# Altium PCB PCB11.PcbDoc (part 1 of 2)
Units mm, origin at the board's own origin, x right, y up, seen from the top; angles counter-clockwise.
Board outline 71.75 x 53.09 mm, 4 copper layers (Top Layer 1, Top Layer, Bottom Layer, Bottom Layer 1), stack 0.603 mm thick; 100 components, 62 nets, 352 pads, 213 vias.
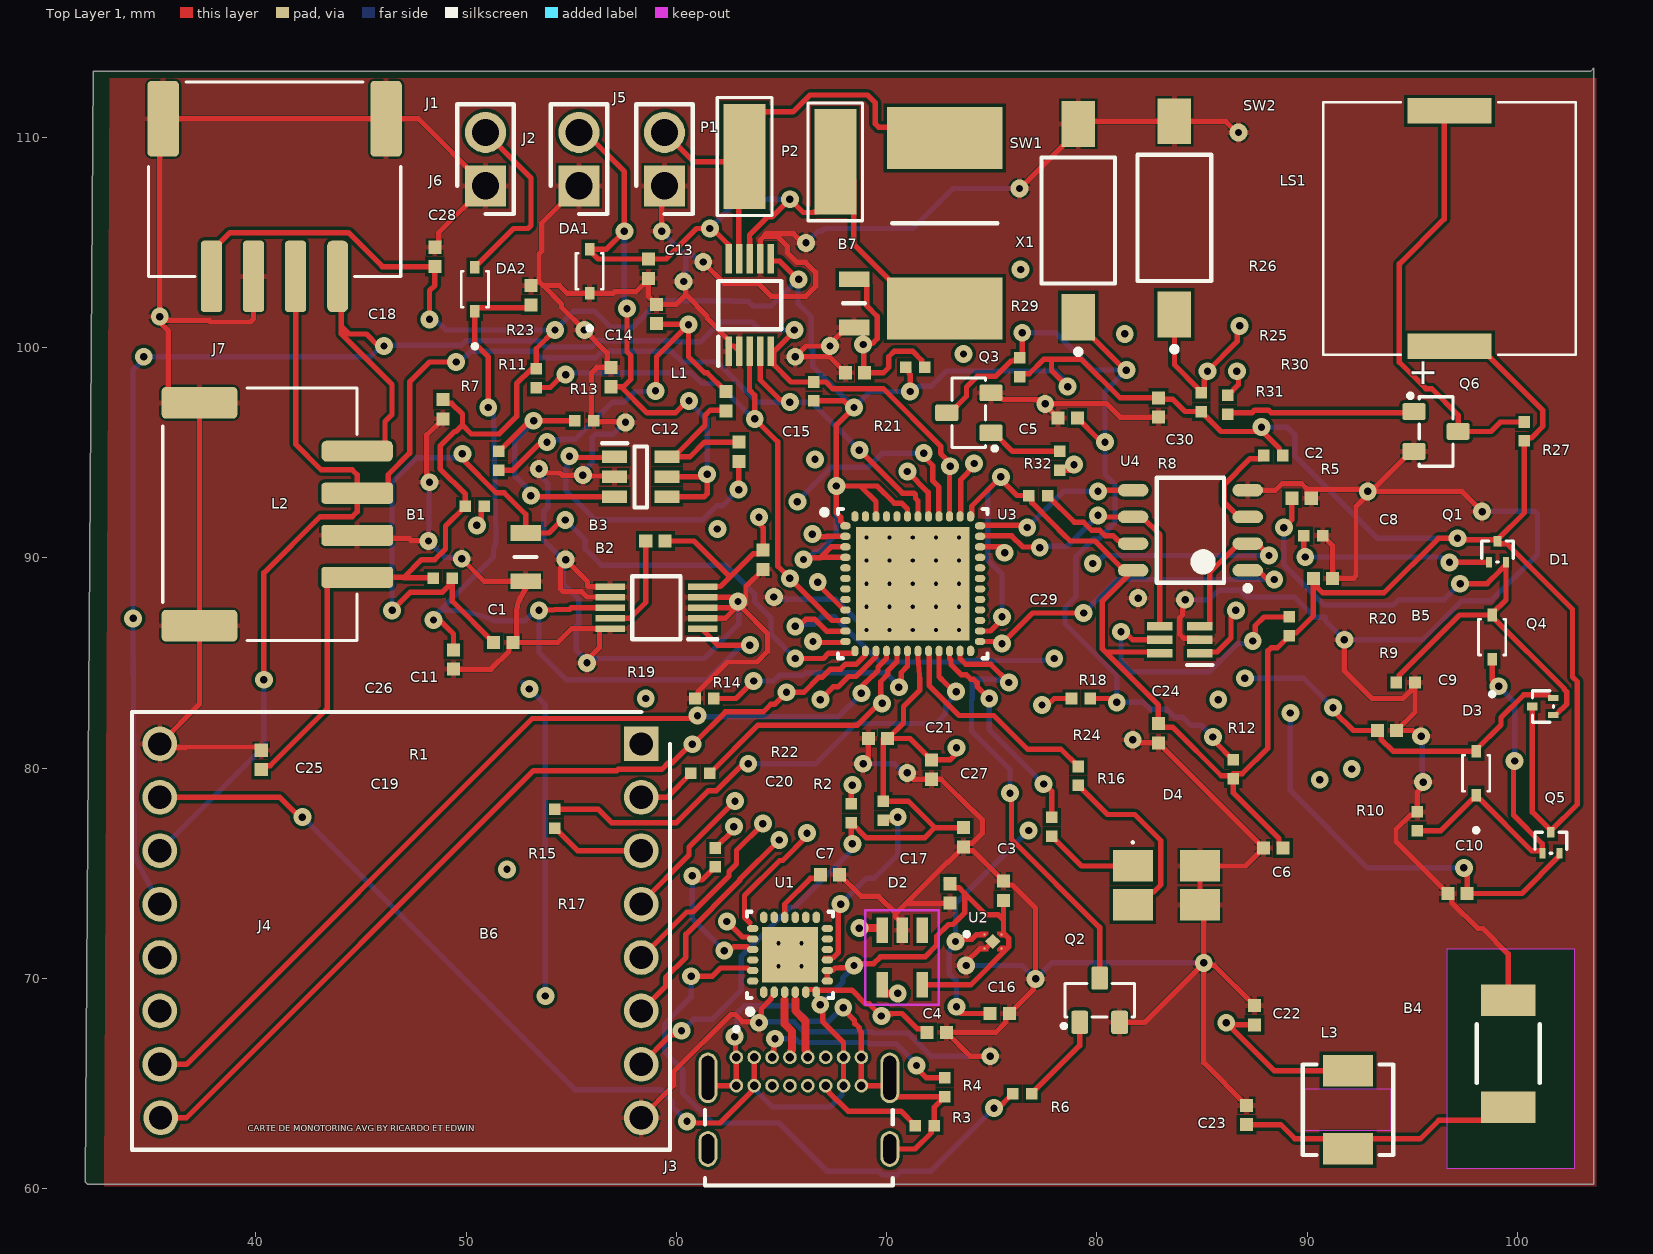
[diagram p0: Top Layer 1 view]
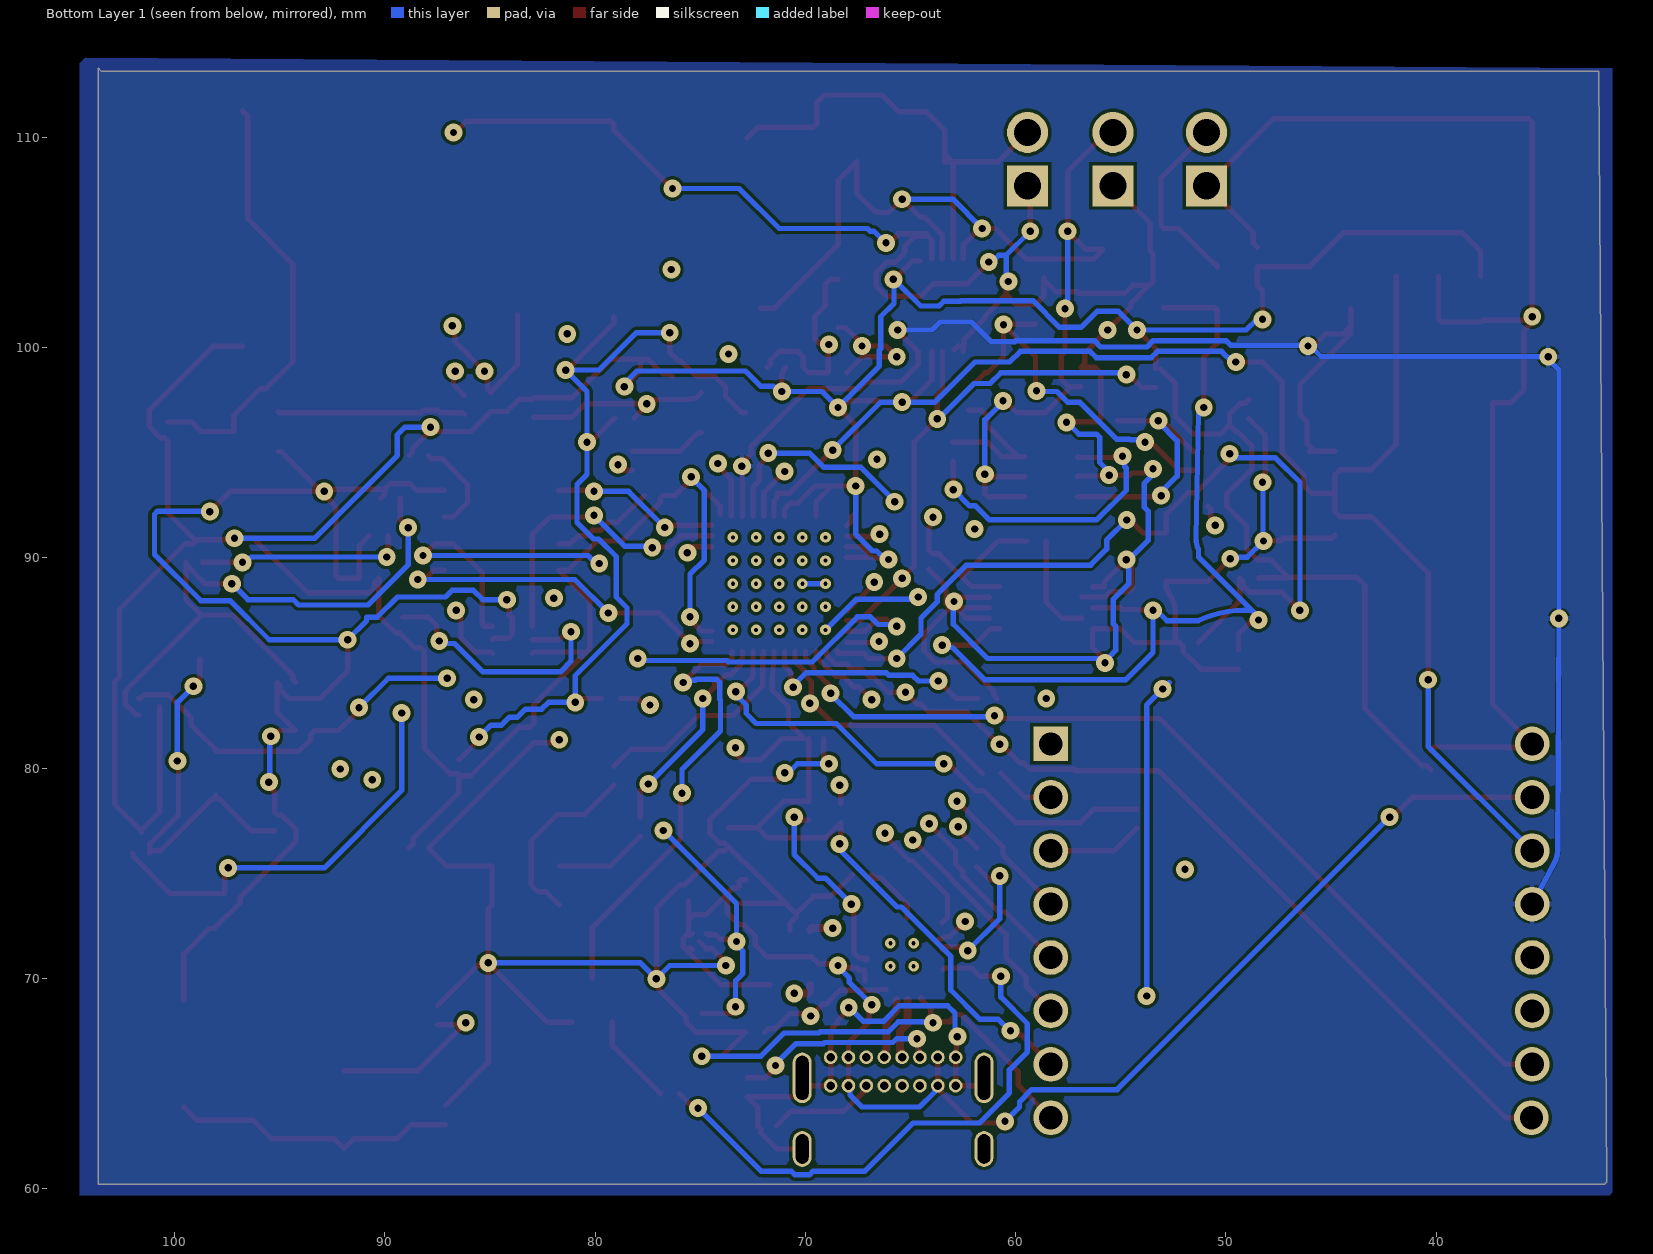
[diagram p1: Bottom Layer 1 view, seen from below]
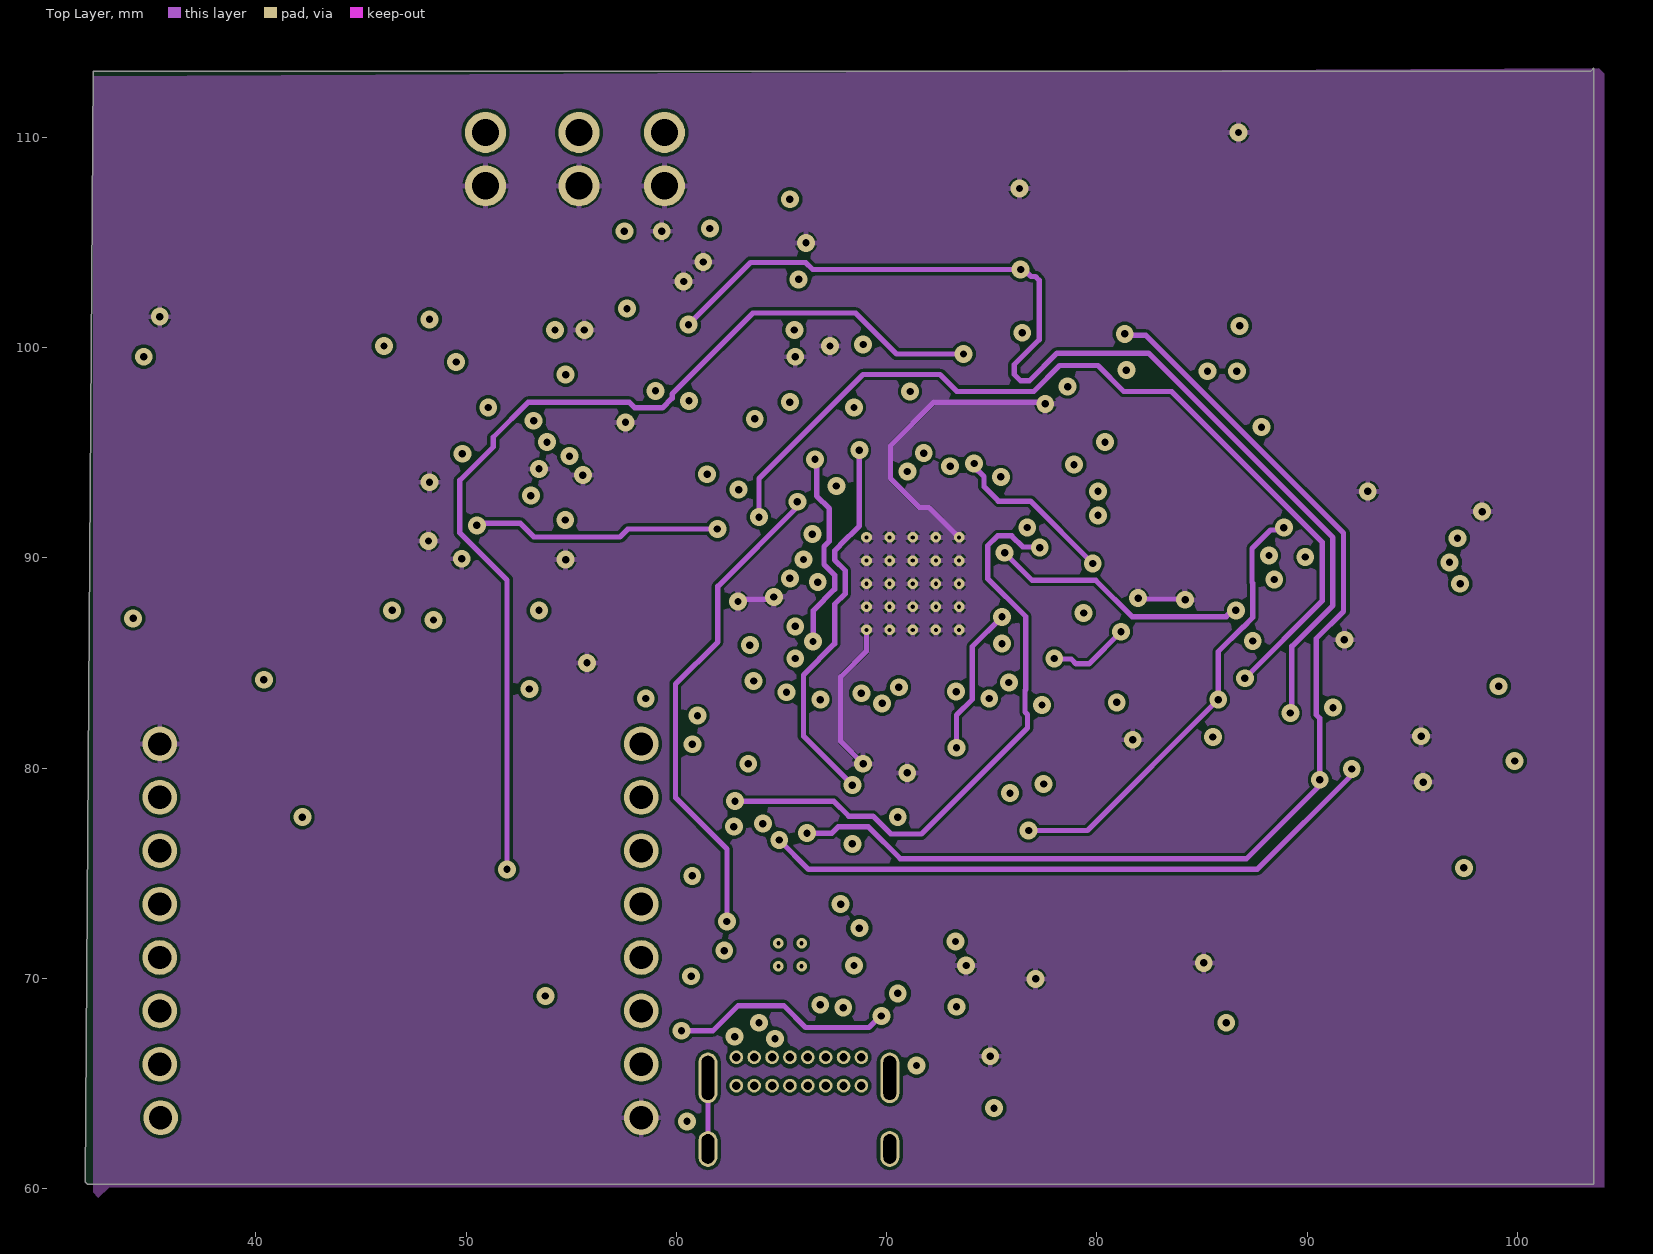
[diagram p2: Top Layer]
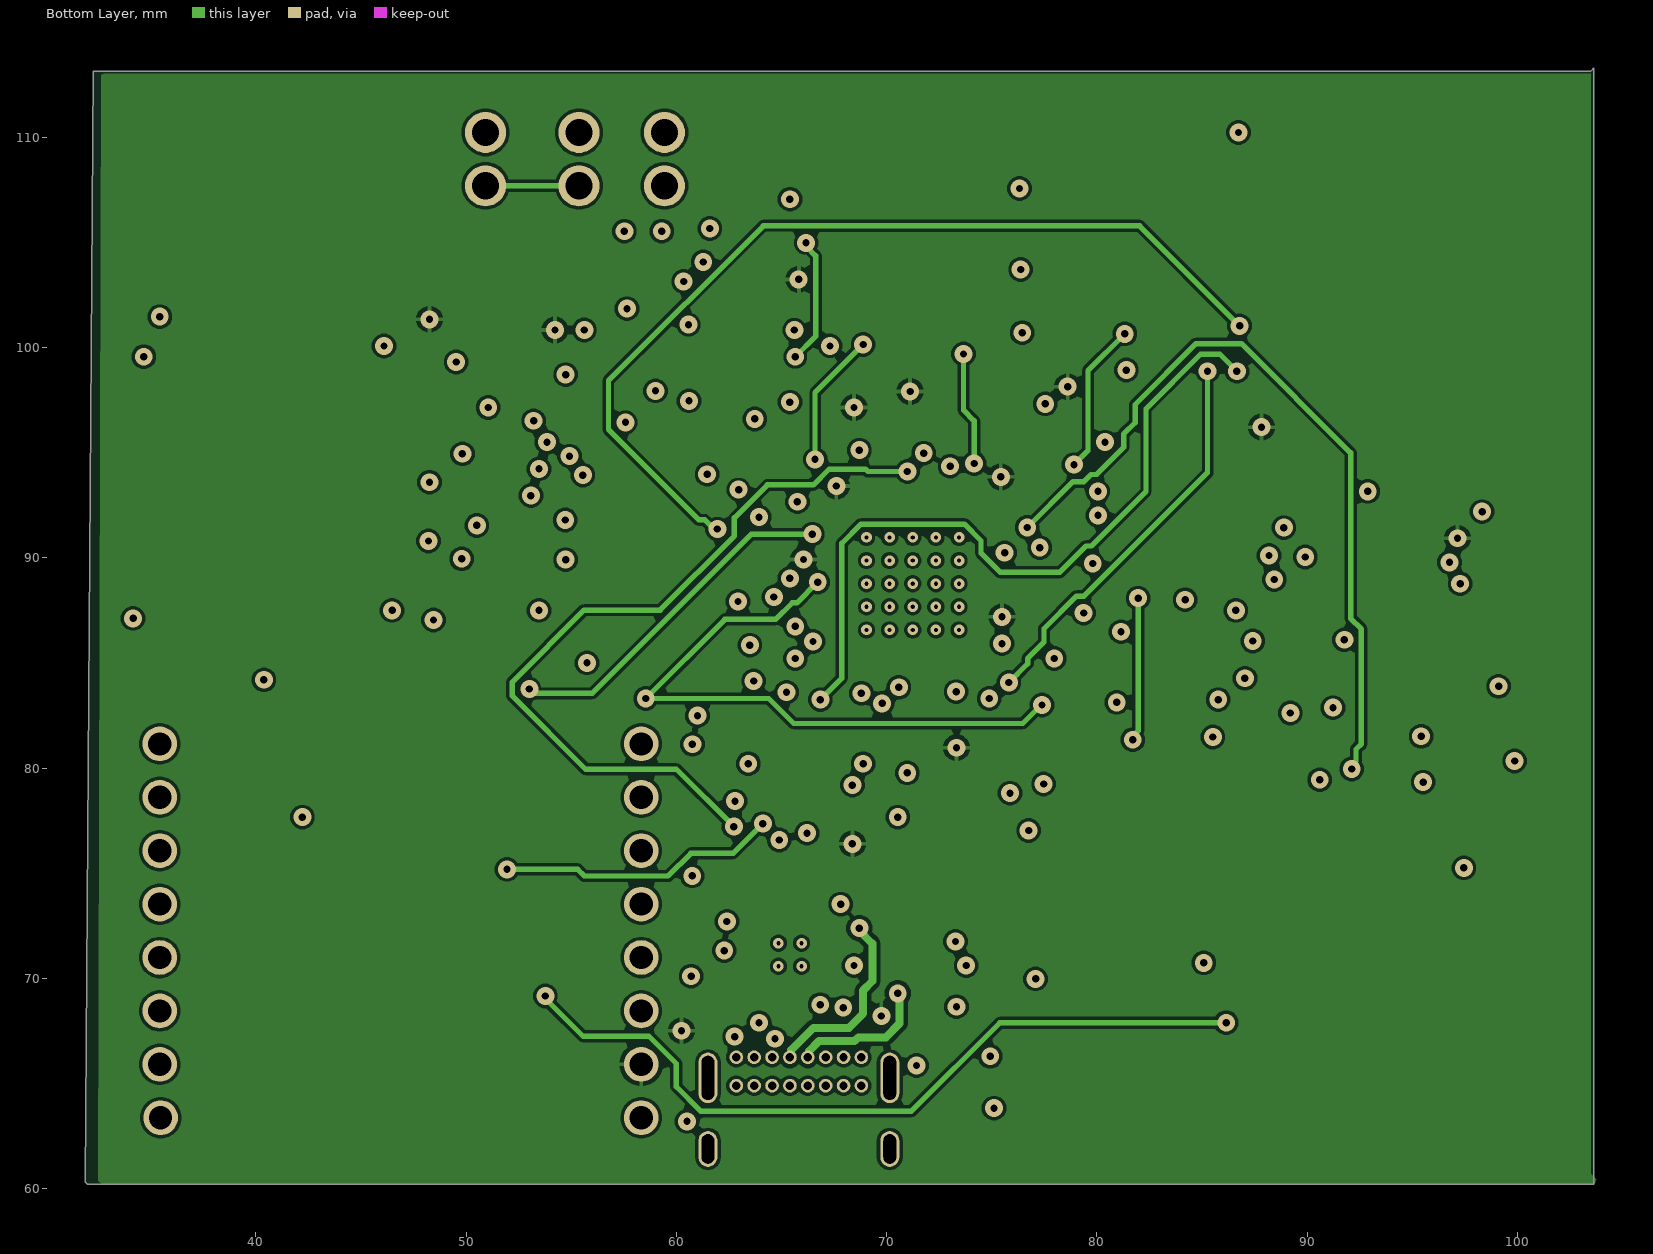
[diagram p3: Bottom Layer]

## Layer stack, top to bottom
Top Solder: solder mask 0.0102, Solder Resist, Dk 3.5
Top Layer 1: signal copper 0.035
Dielectric 2: prepreg 0.0711, PP-006, Dk 4.1
Top Layer: signal copper 0.0356
Dielectric 1: dielectric 0.32, FR-4, Dk 4.8
Bottom Layer: signal copper 0.0356
Dielectric 3: prepreg 0.0711, PP-006, Dk 4.1
Bottom Layer 1: signal copper 0.035
Bottom Solder: solder mask 0.0102, Solder Resist, Dk 3.5

## Board outline
31.877,60.325 32.004,60.198 103.632,60.198 103.632,113.284 103.505,113.157 32.258,113.157

## Design rules (kind name [scope] priority, off if disabled: settings)
AssemblyTestPointUsage [All] p1: isadvanced=TRUE
AssemblyTestpoint AssemblyTestPointStyle_1 [All] p1: isadvanced=TRUE testpointundercomponent=FALSE minsize=1.016 maxsize=2.54 preferedsize=1.524 minholesize=0 maxholesize=1.016 preferedholesize=0.813 testpointgrid=0.025 usegrid=FALSE gridtolerance=0 allowsidetop=TRUE allowsidebottom=TRUE
AssemblyTestpoint [All] p2: isadvanced=TRUE testpointundercomponent=TRUE minsize=1.016 maxsize=2.54 preferedsize=1.524 minholesize=0 maxholesize=1.016 preferedholesize=0.813 testpointgrid=0.025 usegrid=TRUE gridtolerance=0 allowsidetop=TRUE allowsidebottom=TRUE
Clearance Clearance_KeepOut [IsKeepOut] p1: gap=0 ignorepadtopadclearanceinfootprint=FALSE
Clearance Clearance_1 [InDifferentialPair('USB') And (ExistsOnLayer('Top Layer') Or ExistsOnLayer('Bottom Layer')) vs (ExistsOnLayer('Top Layer') Or ExistsOnLayer('Bottom Layer'))] p2: gap=0.19 ignorepadtopadclearanceinfootprint=TRUE sourcerule=47 cellrowname=USB cellrowtype=3 cellcolname=All cellcoltype=0 innerlayers=TRUE
Clearance Clearance_2 [InDifferentialPair('USB') And (ExistsOnLayer('Top Layer 1') Or ExistsOnLayer('Bottom Layer 1')) vs (ExistsOnLayer('Top Layer 1') Or ExistsOnLayer('Bottom Layer 1'))] p3: gap=0.19 ignorepadtopadclearanceinfootprint=TRUE sourcerule=47 cellrowname=USB cellrowtype=3 cellcolname=All cellcoltype=0 outerlayers=TRUE
Clearance Clearance_3 [InDifferentialPair('USB')] p4: gap=0.254 ignorepadtopadclearanceinfootprint=TRUE sourcerule=47 cellrowname=USB cellrowtype=3 cellcolname=All cellcoltype=0
Clearance Clearance_1 [(ExistsOnLayer('Top Layer') Or ExistsOnLayer('Bottom Layer')) vs (ExistsOnLayer('Top Layer') Or ExistsOnLayer('Bottom Layer'))] p5: gap=0.15 ignorepadtopadclearanceinfootprint=TRUE sourcerule=47 cellrowname=All cellrowtype=0 cellcolname=All cellcoltype=0 innerlayers=TRUE
Clearance Clearance_2 [(ExistsOnLayer('Top Layer 1') Or ExistsOnLayer('Bottom Layer 1')) vs (ExistsOnLayer('Top Layer 1') Or ExistsOnLayer('Bottom Layer 1'))] p6: gap=0.15 ignorepadtopadclearanceinfootprint=TRUE sourcerule=47 cellrowname=All cellrowtype=0 cellcolname=All cellcoltype=0 outerlayers=TRUE
Clearance [All] p7: gap=0.254 ignorepadtopadclearanceinfootprint=TRUE except(0: Arc-Hole Track-Hole SMDPad-Hole THPad-Hole Via-Hole Fill-Hole Poly-Hole Region-Hole Text-Hole) ismatrix=TRUE miname0=USB mitype0=3
ComponentClearance [All] p1: isadvanced=TRUE gap=0.254 collisioncheckmode=3 verticalgap=0.254 showdistances=FALSE
DiffPairsRouting [All] p1: maxlimit=0.254 minlimit=0.254 mostfreqgap=0.254 toplayer_minwidth=0.381 toplayer_maxwidth=0.381 toplayer_prefwidth=0.381 midlayer1_minwidth=0.381 midlayer1_maxwidth=0.381 midlayer1_prefwidth=0.381 midlayer2_minwidth=0.381 midlayer2_maxwidth=0.381 midlayer2_prefwidth=0.381 bottomlayer_minwidth=0.381 bottomlayer_maxwidth=0.381 bottomlayer_prefwidth=0.381 maxuncoupledlength=12.7
FabricationTestPointUsage [All] p1: isadvanced=TRUE valid=0 allowmultiple=FALSE
FabricationTestpoint [All] p1: isadvanced=TRUE side=3 testpointundercomponent=TRUE minsize=1.016 maxsize=2.54 preferedsize=1.524 minholesize=0 maxholesize=1.016 preferedholesize=0.813 testpointgrid=0.025 allowsidetop=TRUE allowsidebottom=TRUE usegrid=TRUE gridtolerance=0
FanoutControl Fanout_BGA [IsBGA] p1: isadvanced=TRUE bgadir=Out bgaviamode=Centered fanoutstyle=Auto fanoutdirection=Alternating viagrid=0.025 // Fanout_BGA (Default Rule)
FanoutControl Fanout_LCC [IsLCC] p2: isadvanced=TRUE bgadir=Out bgaviamode=Centered fanoutstyle=Auto fanoutdirection=Alternating viagrid=0.025 // Fanout_LCC (Default Rule)
FanoutControl Fanout_SOIC [IsSOIC] p3: isadvanced=TRUE bgadir=Out bgaviamode=Centered fanoutstyle=Auto fanoutdirection=Alternating viagrid=0.025 // Fanout_SOIC (Default Rule)
FanoutControl Fanout_Small [(CompPinCount < 5)] p4: isadvanced=TRUE bgadir=Out bgaviamode=Centered fanoutstyle=Auto fanoutdirection=OutThenIn viagrid=0.025 // Fanout_Small (Default Rule)
FanoutControl Fanout_Default [All] p5: isadvanced=TRUE bgadir=Out bgaviamode=Centered fanoutstyle=Auto fanoutdirection=Alternating viagrid=0.025 // Fanout_Default (Default Rule)
Height [All] p1: isadvanced=TRUE minheight=0 maxheight=25.4 prefheight=12.7
HoleSize [All] p1: isadvanced=TRUE absolutevalues=TRUE maxlimit=2.54 minlimit=0.025 maxpercent=80.000 minpercent=20.000
HoleToHoleClearance [All] p1: isadvanced=TRUE gap=0.254 allowstackedmicrovias=TRUE
LayerPairs [All] p1: isadvanced=TRUE enforce=TRUE
MinimumSolderMaskSliver [All] p1: isadvanced=TRUE minsoldermaskwidth=0.254
NetAntennae [All] p1: isadvanced=TRUE netantennaetolerance=0
PasteMaskExpansion [All] p1: isadvanced=TRUE expansion=0
PlaneClearance [All] p1: isadvanced=TRUE clearance=0.508
PlaneConnect [All] p1: isadvanced=TRUE planeconnectstyle=Relief reliefexpansion=0.508 reliefentries=4 reliefconductorwidth=0.254 reliefairgap=0.254
PolygonConnect PolygonConnectStyle_1 [InNet('+3V3_PRIO')] p1: connectstyle=Relief reliefconductorwidth=0.2 reliefentries=4 polygonreliefangle="90 Angle" airgapwidth=0.2
PolygonConnect [All] p2: connectstyle=Relief reliefconductorwidth=0.254 reliefentries=4 polygonreliefangle="90 Angle" airgapwidth=0.1
RoutingCorners [All] p1: isadvanced=TRUE cornerstyle=45-Degree minsetback=2.54 maxsetback=2.54
RoutingPriority [All] p1: isadvanced=TRUE routingpriority=0
RoutingVias [All] p1: holewidth=0.35 width=0.85 viastyle="Through Hole" minholewidth=0.35 minwidth=0.85 maxholewidth=0.35 maxwidth=0.85
ShortCircuit [All] p1: isadvanced=TRUE allowed=FALSE
SilkToSilkClearance [All] p1: isadvanced=TRUE silktosilkclearance=0.254
SilkToSolderMaskClearance [IsPad] p1: isadvanced=TRUE minsilkscreentomaskgap=0.254 clearancetoexposedcopper=TRUE
SolderMaskExpansion [All] p1: isadvanced=TRUE expansion=0.102 istentingtop=FALSE
SupplyNets "Schematic Supply Nets_5" [InNet('+36V')] p1: isadvanced=TRUE voltage=0.000
SupplyNets "Schematic Supply Nets_4" [InNet('+5V_USB')] p2: isadvanced=TRUE voltage=0.000
SupplyNets "Schematic Supply Nets_3" [InNet('GND')] p3: isadvanced=TRUE voltage=0.000
SupplyNets "Schematic Supply Nets_2" [InNet('+10V')] p4: isadvanced=TRUE voltage=0.000
SupplyNets "Schematic Supply Nets" [InNet('+3V3_PRIO')] p5: isadvanced=TRUE voltage=0.000
UnRoutedNet [All] p1: isadvanced=TRUE
UnpouredPolygon [All] p1: isadvanced=TRUE
Width [All] p1: maxlimit=0.254 minlimit=0.254 preferedwidth=0.254
3 further rules are at their usual default settings.

## Classes and differential pairs
component class Regulateurs: B2 B3 C11 C12 C13 C14 C15 C16 C17 L1 L2 R11 R13 U2
component class Connecteurs: C18 C19 C25 C26 C28 DA1 DA2 J1 J2 J4 J5 J6 J7 R14 R15
component class "Circuit de priorité": C2 C8 C9 C10 D1 D3 Q1 Q4 Q5 R5 R9 R10
component class Actionneur: D4 LS1 Q6 R16 R24 R25 R27
component class Capteurs: B1 B5 B6 B7 C1 C5 C24 C27 C29 P1 P2 R1 R20 R21 R22 R23 R26 R29 R30 SW1 SW2 X1
component class Feuille_2_ESP32: B4 C20 C21 C22 C23 C30 L3 R17 R18 R19 R31 R32 U3 U4
component class USB_UART: C3 C4 C6 C7 D2 J3 Q2 Q3 R2 R3 R4 R6 R7 R8 R12 U1
differential pair USB: +USB_P -USB_N

## Components (designator, comment, footprint, x,y, rotation, side; value= is the part's Value field where it differs from the comment)
B1 "10K" RESC2212X50N 52.832,90.036 r90 top
B2 "TPS62056DGSG4" SOP50P490X110-10N 59.055,87.63 r180 top
B3 "LMR50410Y3FQDBVRQ1" SOT95P280X145-6N 58.313,93.853 r0 top
B4 "NN01-102" NN01-102 99.568,66.421 r90 top
B5 "TMP126DCKR" SOT65P210X110-6N 83.947,86.106 r180 top
B6 "INA237AIDGST" SOP50P490X110-10N 63.492,102.022 r90 top
B7 "10K" RESC2212X50N 68.453,102.108 r90 top
C1 "100nF" CAPC1005X06N#1 51.768,85.979 r0 top
C2 "10uF" CAPC1005X06N#1 89.741,92.837 r0 top
C3 "1uF" CAPC1005X06N#1 75.565,74.168 r270 top
C4 "3uF" CAPC1005X06N#1 72.39,67.437 r0 top
C5 "100nF" CAPC1005X06N#1 78.613,96.647 r0 top
C6 "0,1uF" CAPC1005X06N#1 88.392,76.2 r180 top
C7 "4,7uF" CAPC1005X06N#1 67.31,74.93 r0 top
C8 "10uF" CAPC1005X06N#1 90.757,89.027 r0 top
C9 "10uF" CAPC1005X06N#1 93.805,81.788 r0 top
C10 "10uF" CAPC1005X06N#1 97.155,74.041 r180 top
C11 "10uF" CAPC1005X06N#1 49.403,85.169 r270 top
C12 "100nF" CAPC1005X06N#1 62.992,95.044 r90 top
C13 "100nF" CAPC1005X06N#1 59.055,101.6 r90 top
C14 "10uF" CAPC1005X06N#1 56.896,98.6 r270 top
C15 "22uF" CAPC1005X06N#1 64.135,89.916 r270 top
C16 "1uF" CAPC1005X06N#1 75.39,68.326 r180 top
C17 "1uF" CAPC1005X06N#1 73.025,74.041 r90 top
C18 "100nF" CAPC1005X06N#1 53.086,102.489 r90 top
C19 "100nF 50V" CAPC1005X06N#1 58.674,103.759 r270 top
C20 "0,1uF" CAPC1005X06N#2 69.596,81.407 r180 top
C21 "100pF" CAPC1005X06N#1 72.136,79.931 r90 top
C22 "1,2pF" CAPC1005X06N#1 87.503,68.247 r90 top
C23 "1,5pF" CAPC1005X06N#1 87.122,63.5 r90 top
C24 "0,1uF" CAPC1005X06N#1 82.931,81.661 r270 top
C25 "100nF" CAPC1005X06N#1 40.259,80.391 r90 top
C26 "100nF" CAPC1005X06N#1 48.895,97.076 r90 top
C27 "100nF" CAPC1005X06N#1 73.66,76.708 r90 top
C28 "100nF" CAPC1005X06N#1 48.514,104.315 r270 top
C29 "100nF" CAPC1005X06N#1 68.501,98.806 r0 top
C30 "100nF" CAPC1005X06N#1 82.931,97.155 r90 top
D1 "SD103AWS-7-F" SD103AWS-7-F 98.806,86.233 r90 top
D2 "824011" 824011 70.739,70.993 r180 top
D3 "SD103AWS-7-F" SD103AWS-7-F 98.044,79.756 r90 top
D4 "598-8610-207F" 5988610207F 83.312,74.422 r0 top
DA1 "SD103AWS-7-F" SD103AWS-7-F 50.419,102.777 r90 top
DA2 "SD103AWS-7-F" SD103AWS-7-F 55.88,103.632 r90 top
J1 "61300211121" 61300211121 50.927,107.696 r90 top
J2 "61300211121" 61300211121 55.372,107.696 r90 top
J3 "Use" USB4085-GF-A 65.83,61.887 r0 top
J4 "825433-8" Connect-Mikrobus 58.333,81.153 r270 top
J5 "61300211121" 61300211121 59.436,107.696 r90 top
J6 "114020164" 114020164 40.894,107.188 r180 top
J7 "114020164" 114020164 41.021,92.075 r270 top
L1 "4,7uH" LQPC1005X06N 59.563,100.251 r90 top
L2 "4,7uH" LQPC1005X06N 61.801,93.599 r0 top
L3 "3.3uH, 3.5A" WE-LHMI_4020 91.948,63.754 r270 top
LS1 "PKLCS1212E40A1-R1" SPKR_PKLCS1212E40A1-R1 96.774,105.664 r90 top
P1 "Plage CMS 10x5" "Plage CMS 10x5" 63.246,109.093 r90 top
P2 "Plage CMS 10x5" "Plage CMS 10x5" 67.564,108.839 r90 top
Q1 "SI3139K-TP" SI3139K-TP 99.06,90.297 r0 top
Q2 "SS8050-G" SS8050-G 80.137,68.961 r0 top
Q3 "SS8050-G" SS8050-G 73.914,96.901 r90 top
Q4 "SI3139K-TP" SI3139K-TP 101.219,82.931 r90 top
Q5 "SI3139K-TP" SI3139K-TP 101.6,76.454 r0 top
Q6 "SS8050-G" SS8050-G 96.139,96.012 r270 top
R1 "10K" RESC1005X06N 48.895,89.027 r180 top
R2 "4,7K" RESC1005X06N 69.85,77.978 r90 top
R3 "5,1K" RESC1005X06N 72.771,64.828 r270 top
R4 "5,1K" RESC1005X06N 71.824,62.992 r0 top
R5 "100K" RESC1005X06N 90.297,91.059 r0 top
R6 "1k" RESC1005X06N 76.454,64.516 r0 top
R7 "1k" RESC1005X06N 50.419,92.456 r0 top
R8 "1k" RESC1005X06N 78.232,94.615 r90 top
R9 "100K" RESC1005X06N 94.684,84.074 r0 top
R10 "100K" RESC1005X06N 95.25,77.47 r90 top
R11 "10K" RESC1005X06N 51.562,94.615 r270 top
R12 "1k" RESC1005X06N 86.487,79.941 r90 top
R13 "10K" RESC1005X06N 55.626,96.52 r180 top
R14 "1K" RESC1005X06N 61.145,79.756 r180 top
R15 "1k" RESC1005X06N 54.229,77.597 r270 top
R16 "330" RESC1005X06N 77.851,77.216 r90 top
R17 "520" RESC1005X06N 61.849,75.75 r270 top
R18 "0R" RESC1005X06N 79.248,83.312 r180 top
R19 "10K" RESC1005X06N 61.341,83.312 r180 top
R20 "5" RESC1005X06N 89.154,86.741 r270 top
R21 "10K" RESC1005X06N 66.548,97.917 r90 top
R22 "10K" RESC1005X06N 68.326,77.851 r90 top
R23 "10K" RESC1005X06N 53.34,98.552 r270 top
R24 "330" RESC1005X06N 79.121,79.629 r90 top
R25 "1K" RESC1005X06N 86.233,97.282 r90 top
R26 "10K" RESC1005X06N 71.374,99.06 r180 top
R27 "1K" RESC1005X06N 100.33,96.012 r90 top
R29 "10K" RESC1005X06N 76.327,99.06 r90 top
R30 "10K" RESC1005X06N 84.963,97.409 r90 top
R31 "10K" RESC1005X06N 88.392,94.869 r180 top
R32 "10K" RESC1005X06N 77.216,92.964 r0 top
SW1 "FSMSM" TECO-FSMSM-2_V 79.121,106.045 r90 top
SW2 "FSMSM" TECO-FSMSM-2_V 83.693,106.172 r90 top
U1 "CP2104-F03-GM" PQFN50P400X400X80_HS-25N 65.409,71.123 r90 top
U2 "NCP167BMX330TBG" NCP167BMX330TBG 75.057,71.755 r0 top
U3 "ESP32-PICO-D4" PQFN50P700X700X104_HS-49N 71.247,88.773 r0 top
U4 "IS66WVS1M8BLL-104NLI" SOIC127P600X175-8N 84.455,91.313 r180 top
X1 "0,001" RESC10052X200N 72.771,105.918 r90 top

## Footprints (in the part's own frame and the unit in brackets; to place one, negate y for a bottom-side part, rotate by r counter-clockwise, add the part's x,y. Pads: shape width x height; smd on the part's side, far side on the other; paste and mask are expansions set on the pad)
824011 [mil] "Suppresseurs ESD / diodes TVS WE-TVS High Speed 5uA 5VDC 2+1"
  rect 21.65x47.24 smd: 1(-37.4,-51.18) 2(0,-51.18) 3(37.4,-51.18) 4(37.4,51.18) 5(-37.5,51)
  Top Layer 1 keep-out lines w5: 68.9,88.58 -68.9,88.58 -68.9,-88.58 68.9,-88.58 68.9,88.58
  body extent -57,-55 57,55, height 57
114020164 [mm]
  rrect50% 1x3.4 smd: 1(-3,3.8)
  rrect30% 1x3.4 smd: 2(-1,3.8) 3(1,3.8) 4(3,3.8)
  rrect26% 1.5x3.6 smd: MP1(-5.3,-3.7) MP2(5.3,-3.7)
  silkscreen extent -6,-5.45 6,3.8, body extent -6.1,-5.59 5.9,4.59, height 5.2
5988610207F [mm]
  rect 1.9x1.5 smd: 1(-1.6,0.925) 2(1.6,0.925) 3(-1.6,-0.925) 4(1.6,-0.925)
  silkscreen extent -1.65,2 -1.55,2.1, body extent -1.6,-1.35 1.6,1.35, height 0.9
61300211121 [mm] "Embases et logements de câbles WR-PHD 2.54mm 2Pin T HT Header"
  rect 1.95x1.95 / inner round 1.95 / far side rect 1.95x1.95 hole 1.3: 1(0,0)
  round 1.95 hole 1.3: 2(2.54,0)
  silkscreen extent -1.35,-1.35 3.89,1.35
CAPC1005X06N#1 [mm] "Chip Capacitor, 2-Leads, Body 1,00x0,50mm, IPC Medium Density"
  rect 0.62x0.62 smd: 1(-0.46,0) 2(0.46,0)
  body extent -0.53,-0.28 0.53,0.28, height 0.55
CAPC1005X06N#2 [mm] "Chip Capacitor, 2-Leads, Body 1,00x0,50mm, IPC Medium Density"
  rect 0.62x0.62 smd paste+0 mask+0.102: 1(-0.46,0)
  rect 0.62x0.62 smd: 2(0.46,0)
  body extent -0.53,-0.28 0.53,0.28, height 0.55
Connect-Mikrobus [mm]
  rect 1.65x1.65 / inner round 1.65 / far side rect 1.65x1.65 hole 1.1: 1(0,0)
  round 1.65 hole 1.1: 2(2.54,0) 3(5.08,0) 4(7.62,0) 5(10.16,0) 6(12.7,0) 7(15.24,0) 8(17.78,0) 9(17.78,-22.86) 10(15.24,-22.9) 11(12.7,-22.9) 12(10.16,-22.9) 13(7.62,-22.9) 14(5.08,-22.9) 15(2.54,-22.9) 16(0,-22.9)
  silkscreen extent -1.52,-24.22 19.3,1.37, body extent -1.37,-24.18 19.14,1.28, height 6.7
LQPC1005X06N [mm]
  rect 0.62x0.62 smd: 1(-3.254,-2.794) 2(-2.334,-2.794)
  body extent -3.32,-3.07 -2.27,-2.52, height 0.55
NCP167BMX330TBG [mm] "Régulateurs de tension LDO LDO 700 MA ULTRA-LOW NOISE 3.3V"
  rect 0.1x0.1 smd paste-1 mask+0: 1(-0.405,0.325) 2(-0.405,-0.325) 3(0.405,-0.325) 4(0.405,0.325)
  rect 0.52x0.52 smd rot 45 mask+0.05: 5(0,0)
  Top Layer 1 region: -0.21,-0.345 -0.21,-0.455 -0.6,-0.455 -0.6,-0.195 -0.36,-0.195
  Top Layer 1 region: 0.6,0.195 0.36,0.195 0.21,0.345 0.21,0.455 0.6,0.455
  Top Layer 1 region: 0.6,-0.455 0.21,-0.455 0.21,-0.345 0.36,-0.195 0.6,-0.195
  Top Layer 1 region: -0.21,0.345 -0.36,0.195 -0.6,0.195 -0.6,0.455 -0.21,0.455
  silkscreen extent -1.35,0.25 -1.15,0.45, body extent -0.5,-0.5 0.5,0.5, height 0.38
NN01-102 [mm] "Antennes Compact Reach Xtend 2.4 GHz"
  rect 1.5x2.6 smd: 1(-2.55,0) 2(2.55,0)
  silkscreen extent -1.4,-1.5 1.4,1.5, body extent -3.6,-1.5 3.4,1.5, height 2.2
"Plage CMS 10x5" [mm] "Plage CMS 10x5"
  rect 5x2 smd paste-1 mask+0.15: 1(0,0)
  silkscreen extent -2.8,-1.3 2.8,1.3
PQFN50P400X400X80_HS-25N [mm] "PQFN, 24-Leads, Body 4,00x4,00mm, Pitch 0,50mm, Thermal Pad 2,65x2,65mm, IPC Medium Density"
  oval 0.55x0.35 smd: 1(-1.775,1.25) 2(-1.775,0.75) 3(-1.775,0.25) 4(-1.775,-0.25) 5(-1.775,-0.75) 6(-1.775,-1.25) 13(1.775,-1.25) 14(1.775,-0.75) 15(1.775,-0.25) 16(1.775,0.25) 17(1.775,0.75) 18(1.775,1.25)
  oval 0.35x0.55 smd: 7(-1.25,-1.775) 8(-0.75,-1.775) 9(-0.25,-1.775) 10(0.25,-1.775) 11(0.75,-1.775) 12(1.25,-1.775) 19(1.25,1.775) 20(0.75,1.775) 21(0.25,1.775) 22(-0.25,1.775) 23(-0.75,1.775) 24(-1.25,1.775)
  rect 2.65x2.65 smd: 25(0,0)
  silkscreen extent -2.82,-2.05 2.05,2.05, body extent -2.05,-2.05 2.05,2.05, height 0.8
PQFN50P700X700X104_HS-49N [mm] "PQFN, 48-Leads, Body 7,00x7,00mm, Pitch 0,50mm, Thermal Pad 5,40x5,40mm, IPC Medium Density"
  oval 0.5x0.35 smd: 1(-3.2,2.75) 2(-3.2,2.25) 3(-3.2,1.75) 4(-3.2,1.25) 5(-3.2,0.75) 6(-3.2,0.25) 7(-3.2,-0.25) 8(-3.2,-0.75) 9(-3.2,-1.25) 10(-3.2,-1.75) 11(-3.2,-2.25) 12(-3.2,-2.75) 25(3.2,-2.75) 26(3.2,-2.25) 27(3.2,-1.75) 28(3.2,-1.25) 29(3.2,-0.75) 30(3.2,-0.25) 31(3.2,0.25) 32(3.2,0.75) 33(3.2,1.25) 34(3.2,1.75) 35(3.2,2.25) 36(3.2,2.75)
  oval 0.35x0.5 smd: 13(-2.75,-3.2) 14(-2.25,-3.2) 15(-1.75,-3.2) 16(-1.25,-3.2) 17(-0.75,-3.2) 18(-0.25,-3.2) 19(0.25,-3.2) 20(0.75,-3.2) 21(1.25,-3.2) 22(1.75,-3.2) 23(2.25,-3.2) 24(2.75,-3.2) 37(2.75,3.2) 38(2.25,3.2) 39(1.75,3.2) 40(1.25,3.2) 41(0.75,3.2) 42(0.25,3.2) 43(-0.25,3.2) 44(-0.75,3.2) 45(-1.25,3.2) 46(-1.75,3.2) 47(-2.25,3.2) 48(-2.75,3.2)
  rect 5.4x5.4 smd: 49(0,0)
  silkscreen extent -4.32,-3.55 3.55,3.55, body extent -3.55,-3.55 3.55,3.55, height 1.04
RESC1005X06N [mm] "Chip Resistor, 2-Leads, Body 1,00x0,50mm, IPC Medium Density"
  rect 0.55x0.55 smd: 1(-0.45,0) 2(0.45,0)
  body extent -0.53,-0.28 0.53,0.28, height 0.55
RESC2212X50N [mm]
  rect 0.75x1.45 smd: 1(-1.15,0) 2(1.15,0)
  silkscreen extent 0,-0.53 0,0.53, body extent -1.07,-0.63 1.07,0.63, height 0.5
RESC10052X200N [mm]
  rect 2.95x5.5 smd: 1(-4.05,0) 2(4.05,0)
  silkscreen extent 0,-2.5 0,2.5, body extent -5,-2.6 5,2.6, height 2
SD103AWS-7-F [mm]
  rect 0.6x0.46 smd: 1(-1.05,0) 2(1.05,0)
  silkscreen extent -2.81,-0.65 0.85,0.65, body extent -1.25,-0.65 1.25,0.65, height 1.2
SI3139K-TP [mm] "MOSFET P-Channel MOSFET"
  rect 0.28x0.5 smd paste+0 mask+0.075: 1(-0.4,-0.5) 2(0.4,-0.5)
  rect 0.36x0.5 smd paste+0 mask+0.075: 3(0,0.5)
  silkscreen extent -0.75,-0.5 0.75,0.5, body extent -0.6,-0.6 0.6,0.6, height 0.55
SOIC127P600X175-8N [mm] "SOIC, 8-Leads, Body 4,90x3,90mm, Pitch 1,27mm, IPC Medium Density"
  oval 1.45x0.6 smd: 1(-2.725,1.905) 2(-2.725,0.635) 3(-2.725,-0.635) 4(-2.725,-1.905) 5(2.725,-1.905) 6(2.725,-0.635) 7(2.725,0.635) 8(2.725,1.905)
  silkscreen extent -2.85,-2.5 1.6,2.88, body extent -3,-2.5 3,2.5, height 1.75
SOP50P490X110-10N [mm]
  rect 1.4x0.3 smd: 1(-2.2,1) 2(-2.2,0.5) 3(-2.2,0) 4(-2.2,-0.5) 5(-2.2,-1) 6(2.2,-1) 7(2.2,-0.5) 8(2.2,0) 9(2.2,0.5) 10(2.2,1)
  silkscreen extent -2.9,-1.5 1.15,1.5, body extent -2.46,-1.5 2.46,1.5, height 1.06
SOT65P210X110-6N [mm]
  rect 1.2x0.4 smd: 1(-0.95,0.65) 2(-0.95,0) 3(-0.95,-0.65) 4(0.95,-0.65) 5(0.95,0) 6(0.95,0.65)
  silkscreen extent -1.55,1.2 -0.35,1.2, body extent -1.05,-1 1.05,1, height 1
SOT95P280X145-6N [mm]
  rect 1.2x0.6 smd: 1(-1.25,0.95) 2(-1.25,0) 3(-1.25,-0.95) 4(1.25,-0.95) 5(1.25,0) 6(1.25,0.95)
  silkscreen extent -1.85,-1.45 0.3,1.6, body extent -1.4,-1.45 1.4,1.45, height 1.2
SPKR_PKLCS1212E40A1-R1 [mm]
  rect 1.2x4 smd: N(5.6,0) P(-5.6,0)
  silkscreen extent -6,-6 6,6, body extent -6,-6 6,6, height 3
SS8050-G [mm]
  rrect25% 0.8x1.1 smd paste+0 mask+0.075: 1(-0.95,-1.05) 2(0.95,-1.05) 3(0,1.05)
  silkscreen extent -1.77,-1.3 1.65,0.8, body extent -1.5,-1.3 1.5,1.3, height 1.1
TECO-FSMSM-2_V [mm] "SMD, 2-Leads, Body 6x3.5mm, Pitch 9.19mm"
  rect 2.2x1.6 smd: 1(-4.595,0)
  rect 2.18x1.6 smd: 2(4.595,0)
  silkscreen extent -6.37,-1.75 3,1.75, body extent -4.98,-1.75 4.98,1.75, height 4.4
USB4085-GF-A [mm]
  round 0.65 hole 0.4: A1(-2.975,4.36) A4(-2.125,4.36) A5(-1.275,4.36) A6(-0.425,4.36) A7(0.425,4.36) A8(1.275,4.36) A9(2.125,4.36) A12(2.975,4.36) B1(2.975,3.01) B4(2.125,3.01) B5(1.275,3.01) B6(0.425,3.01) B7(-0.425,3.01) B8(-1.275,3.01) B9(-2.125,3.01) B12(-2.975,3.01)
  oval 0.9x1.7 hole 0.6 slot 1.4 at 90 deg: S1(-4.325,0) S2(4.325,0)
  oval 0.9x2.4 hole 0.6 slot 2.1 at 90 deg: S3(-4.325,3.38) S4(4.325,3.38)
  silkscreen extent -4.47,-1.74 4.47,5.8, body extent -4.47,-4.25 4.47,4.92, height 3.46
WE-LHMI_4020 [mm] "SMT Power Inductor, 2-Leads, body 4.06x4.06mm"
  rect 1.5x2.4 smd: 1(-1.85,0) 2(1.85,0)
  Top Layer 1 keep-out region: -1,2.03 1,2.03 1,-2.03 -1,-2.03
  silkscreen extent -2.15,-2.15 2.15,2.15, body extent -2.22,-2.03 2.23,2.03, height 1.8

## Part data
B1 B7: library part NB12K00103JBB, "NTC SMD Thermistor, NB12K, 10K, 5% AVX 10k 0805 Protection NTC Thermistor, 5s, 2 x 1.25 x 1.3mm", Manufacturer_Name="Kyocera AVX", Mouser Part Number=581-NB12K00103JBB, Arrow Part Number=NB12K00103JBB, Arrow Price/Stock=https://www.arrow.com/en/products/nb12k00103jbb/avx, Datasheet Link=https://datasheet.datasheetarchive.com/originals/distributors/Datasheets-DGA6/551314.pdf, Geometry.Height=0.5mm, Manufacturer_Part_Number=NB12K00103JBB, Mouser Price/Stock=https://www.mouser.co.uk/ProductDetail/AVX/NB12K00103JBB/?qs=4%252B6%252BTdINQeDPvI%252BQUQjJ3Q%3D%3D
B2: "TEXAS INSTRUMENTS - TPS62056DGSG4 - Synchronous Buck (Step Down) Switching Regulator, Fixed, 2.7V-10Vin, 3.3V/0.8A out, 850kHz, VSSOP-10", Manufacturer_Name="Texas Instruments", Mouser Part Number=595-TPS62056DGSG4, Manufacturer_Part_Number=TPS62056DGSG4
B3: "Régulateurs de tension de commutation Automotive qualified SIMPLE SWITCHER 4-V to 36-V, 1-A synchronous step-down converter 6-SOT-23 -40 to 150", Manufacturer_Name="Texas Instruments", Mouser Part Number=595-R50410Y3FQDBVRQ1, Manufacturer_Part_Number=LMR50410Y3FQDBVRQ1
B4: "Antennes Compact Reach Xtend 2.4 GHz"
B5: "Board Mount Temperature Sensors +/-0.25 C SPI temperature sensor with 175 C operation, CRC and slew-rate alert", Manufacturer_Name="Texas Instruments", Mouser Part Number=595-TMP126DCKR, Manufacturer_Part_Number=TMP126DCKR
B6: "Current Sense Amplifiers 85-V, 16-bit, I2C output current/voltage/power monitor with alert 10-VSSOP -40 to 125", Manufacturer_Name="Texas Instruments", Mouser Part Number=595-INA237AIDGST, Manufacturer_Part_Number=INA237AIDGST
C1 C2 C3 C4 C5 C6 C7 C8 C9 C10 C11 C12 C13 C14 C15 C16 C17 C18 C19 C20 C21 C22 C23 C24 C25 C26 C27 C28 C29 C30: library part Capacitor
D1 D3 DA1 DA2: "Diode Array 3 Independent Schottky 40V 175mA Surface Mount 6-TSSOP, SC-88, SOT-363"
D2: "TVS Diode Array WE-TVS, High Speed Series  - Low capazity - No leakage current - Low clamping voltage - high ESD voltage protection  -- USB 1.0 - 2.0"
D4: "Standard LEDs - SMD Red/Green WC 80/50mcd 645/570nm", Manufacturer_Name=Dialight, Mouser Part Number=645-598-8610-207F, Arrow Part Number=598-8610-207F, Arrow Price/Stock=https://www.arrow.com/en/products/598-8610-207f/dialight?region=nac, Datasheet Link=https://media.digikey.com/pdf/Data%20Sheets/Dialight%20PDFs/598%20Series%201210%20Pkg%20Bi-Color.pdf, Geometry.Height=0.8mm, Manufacturer_Part_Number=598-8610-207F, Mouser Price/Stock=https://www.mouser.co.uk/ProductDetail/Dialight/598-8610-207F?qs=7JStj%2FjQ2SFuCjosqwklHQ%3D%3D
J1 J2 J5: "WURTH ELEKTRONIK - 61300211121 - HEADER, 2.54MM, PIN, THT, VERTICAL, 2WAY"
J3: library part USB4085-GF-A, "Connecteurs USB USB Type C, 2.0, Rec, TH , G/F, RA , Top Mnt, T & R"
J4: library part Connect-Mikrobus, "Headers & Wire Housings 8P double for connection mikrobus", Manufacturer_Name="TE Connectivity", Mouser Part Number=571-825433-8, Manufacturer_Part_Number=825433-8
J6 J7: "Seeed Studio Accessories Grove Female Header - SMD-4P-2.0mm-90D-20Pcs", Manufacturer_Name="Seeed Studio", Mouser Part Number=713-114020164, Manufacturer_Part_Number=114020164
L1 L2: library part Bobine
L3: library part 74437324033, "WE-LHMI SMT Power Inductor, size 4020, 3.3uH, 3.5A, 76mOhm", Case/Size Code=4020, DC Resistance=69mOhm, DC Resistance Max=76mOhm, Inductance=3.3uH, Manufacturer="Wurth Elektronik", Operating Temperature Max=125°C, Operating Temperature Min=-40°C, Performance Rated Current=3.5A, Saturation Current @ 10%=2.75A, Saturation Current @ 30%=5.45A, Self Resonant Frequency=40MHz, Category="Power Inductors", ComponentLink1Description="Website Link", ComponentLink1URL=https://www.we-online.com/redexpert/article/74437324033?ad, ComponentLink2Description="Datasheet Link", ComponentLink2URL=https://www.we-online.com/redexpert/spec/74437324033?ad, Height=1.8mm, Length=4.06mm, Manufacturer Part Number=74437324033, Match Code=WE-LHMI, Mount="Surface Mount", Packaging="Tape and Reel", Width=4.06mm
LS1: "Buzzers Transducer, Externally Driven Piezo 1.5V 2kHz 70dB @ 1.5V, 10cm Surface Mount Solder Pads", Package=None, Availability=Unavailable, MF="Murata Electronics", MP=PKLCS1212E40A1-R1, Price=None
P1 P2: "Plage de report CMS 10x5mm", Footprint_statut=ok, PN=L30
Q1 Q4 Q5: "MOSFET P-Channel MOSFET"
Q2 Q3 Q6: "Bipolar Transistors - BJT NPN TRANSISTOR 1.5A 40V"
R1 R2 R3 R4 R5 R6 R7 R8 R9 R10 R11 R12 R13 R14 R15 R16 R17 R18 R19 R20 R21 R22 R23 R24 R25 R26 R27 R29 R30 R31 R32: library part Resistor
SW1 SW2: library part CMP-2000-07511-1, "FSMSM Push Button Switch, 50 mA, -35 to 85 degC, 2-Pin SMD, RoHS, Bulk", Case\/Package=SMD/SMT, Contact Current Rating=50mA, Contact Resistance=100mOhm, Manufacturer="TE Connectivity", Max Operating Temperature=85degC, Max Voltage Rating (DC)=12V, Min Operating Temperature=-35degC, Operating Force=180gf, Package Description="2-Pin Surface Mount Device, Body 6 x 3.5 mm, Pitch 9.19 mm", Package Quantity=1000, Voltage Rating (DC)=24V, Actuator Length=1.07mm, Actuator Material=Polyamide, Contact Material=Brass, Contact Plating=Silver, Current Rating=50mA, Datasheet URL=http://www.te.com/commerce/DocumentDelivery/DDEController?Action=showdoc&DocId=Customer+Drawing%7F1437566-3%7FC2%7Fpdf%7FEnglish%7FENG_CD_1437566-3_C2_1437566_3_1_c.dwg.pdf%7F1437566-3, Datasheet Version="Rev. C2, 08/2014", Electrical Life=20000Cycles, ELV=Compliant, Illumination Type=Illuminated, Lead Free=LeadFree, Manufacturer URL=http://www.te.com/, Mechanical Life=20000Cycles, Mount=SurfaceMount, Mounting Technology=SurfaceMount, Orientation=Straight, Package Reference=FSMSM, Packaging=LoosePiece, REACH SVHC=Unknown, RoHSCompliant=true, Switch Travel=0.25mm, Termination=GullWing, Throw Configuration=SPST
U1: library part USBBridge, "USB Bridge, USB to UART USB 2.0 UART Interface 24-QFN (4x4)", Manufacturer 1="Silicon Labs", Manufacturer Part Number 1=CP2104-F03-GM, Supplier 1="Arrow Electronics", Supplier Part Number 1=CP2104-F03-GM
U2: "Régulateurs de tension LDO LDO 700 MA ULTRA-LOW NOISE 3.3V"
U3: library part ESP32, "Système RF sur puce - SoC SIP module ESP32 with 4MByte Flash, Dual Core MCU, Wi-Fi & Bluetooth Combo, LGA48-pin, 7*7mm", Manufacturer 1="Espressif Systems", Supplier Part Number 1=1904-1029-1-ND, Manufacturer Part Number 1=ESP32-PICO-D4, Supplier 1=Digi-Key
U4: library part SRAM, "SRAM 8Mb, SerialRAM, 2.7V-3.6V, 104MHz, 8 pin SOIC 150 mil, RoHS", Manufacturer 1=ISSI, Supplier Part Number 1=706-IS66WVS1M8BLL-104NLI-ND, Manufactuer Part Number 1=IS66WVS1M8BLL-104NLI, Supplier 1=Digi-Key
X1: library part PSR400ITQFF0L50, "ROHM - PSR400ITQFF0L50 - SMD Current Sense Resistor, 500 ohm, PSR Series, 3921 [1052 Metric], 4 W, +/- 1%, Metal Strip", Manufacturer_Name="ROHM Semiconductor", Mouser Part Number=755-PSR400ITQFF0L50, Datasheet Link=https://componentsearchengine.com/Datasheets/2/PSR400ITQFF0L50.pdf, Geometry.Height=2mm, Manufacturer_Part_Number=PSR400ITQFF0L50, Mouser Price/Stock=https://www.mouser.co.uk/ProductDetail/ROHM-Semiconductor/PSR400ITQFF0L50?qs=493kPxzlxfLaT1w5Mo%252BtHg%3D%3D

## Via types
v1: diameter 0.85, hole 0.35, Top Layer 1 to Bottom Layer 1, 184 vias
v2: diameter 0.5, hole 0.2, Top Layer 1 to Bottom Layer 1, 29 vias

## Nets (pads, with @x,y where several pads share a name; then routed paths per layer and width w, separated by ;. In a path a pad name is that pad's centre, name@x,y a point inside that pad or via, vN(x,y) a via of type N, cw(c..) or ccw(c..) an arc to the next point about the centre after c; other vN are vias at no path point)
+3V3_PRIO: B5.6 B6.6 C4.1 C6.1 C8.1 C20.1 C21.2 C24.1 C25.1 C26.2 C27.2 C28.2 C30.2 J4.7 J6.4 J7.4 LS1.P Q1.3 Q4.3 Q5.3 R1.2 R2.2 R7.1 R12.1 R20.2 R21.1 R22.1 R23.1 R26.2 R27.1 R29.1 R30.1 R31.1 R32.1 U1.5 U1.6 U3.1 U3.3 U3.4 U3.19 U3.26 U3.37 U3.43 U3.46 U4.8 | length 299.8
  Top Layer 1 w0.254: J6.4@37.894,103.388 37.894,104.588 38.775,105.469 44.405,105.469 46.019,103.855 C28.2@48.514,103.855 48.514,102.962 48.26,102.708 v1(48.26,101.346) ; C25.1@40.259,79.931 40.442,80.114 40.681,80.114 43.398,82.831 43.398,88.704 43.769,89.075 J7.4@44.821,89.075 47.038,89.075 47.879,89.916 48.511,89.916 49.022,90.427 49.022,91.509 R7.1@49.969,92.456 49.969,93.033 48.768,94.234 48.768,95.33 49.45,96.012 49.53,96.012 49.829,96.311 ; 47.038,89.051 48.421,89.051 R1.2@48.445,89.027 ; C26.2@48.895,97.536 49.078,97.353 49.317,97.353 49.829,96.841 49.829,96.311 ; R23.1@53.107,98.985 52.407,98.285 52.407,96.723 51.577,95.893 50.247,95.893 49.829,96.311 ; R23.1@53.34,99.002 53.34,99.949 v1(54.229,100.838) ; J4.7@58.333,65.913 59.73,67.31 v1@60.325,67.31 ; B6.6@64.532,104.124 64.913,104.124 65.791,103.246 v1(65.82,103.246) ; v1(66.048,89.924) 66.125,90.001 66.846,90.001 66.868,90.023 ; U1.5@66.161,69.469 66.525,69.469 66.528,69.472 66.559,69.441 68.354,69.441 69.008,68.787 69.177,68.787 v1@69.677,68.288 ; R21.1@66.548,97.467 67.98,97.467 68.292,97.155 v1(68.453,97.155) 67.615,96.317 v1(67.615,93.418) 69.552,93.418 70.366,92.604 70.718,92.604 70.997,92.325 U3.43@70.997,91.973 ; v1@67.615,93.304 67.615,92.147 67.818,91.944 67.818,91.752 U3.1@68.047,91.523 ; U3.4@68.047,90.023 66.868,90.023 ; U3.3@68.047,90.523 67.368,90.523 66.868,90.023 ; v1@68.326,76.327 R22.1@68.326,77.401 69.03,76.697 71.822,76.697 72.294,77.168 ; 68.77,93.408 69.497,92.682 U3.46@69.497,91.973 ; v1(69.752,68.212) v1@69.677,68.288 ; C20.1@69.85,81.407 R2.2@69.85,78.428 71.034,78.428 72.294,77.168 ; 70.28,68.326 69.715,68.326 v1@69.677,68.288 ; 70.28,68.326 70.739,68.326 71.454,67.611 71.756,67.611 C4.1@71.93,67.437 ; R26.2@70.924,99.06 71.072,98.912 71.072,98.771 71.12,98.723 v1(71.12,97.917) ; U3.19@71.497,85.573 71.497,85.285 71.571,84.394 ; 71.572,84.29 71.572,83.694 70.806,82.927 70.806,82.157 C20.1@70.056,81.407 71.12,81.407 C21.2@72.136,80.391 73.025,80.391 v1@73.406,80.772 ; C27.2@73.66,77.168 72.294,77.168 ; U3.37@74.053,92.068 74.053,92.468 v1@75.373,93.788 ; U3.26@74.447,86.523 74.948,86.523 75.42,86.995 v1@75.438,86.995 ; v1(75.438,93.853) 75.438,93.723 76.197,92.964 R32.1@76.766,92.964 76.914,92.816 76.914,92.627 77.93,91.611 ; R29.1@76.327,98.61 76.475,98.758 76.787,98.758 77.47,99.441 77.849,99.441 ; 77.931,91.611 78.403,91.139 ; 78.403,91.138 78.736,90.805 79.908,90.805 81.305,89.408 U4.8@81.73,89.408 80.264,87.942 80.264,85.674 80.413,85.525 ; v1(78.613,98.144) 77.849,98.908 77.849,99.441 ; B5.6@82.997,85.456 82.928,85.525 80.413,85.525 ; R12.1@86.487,79.735 86.92,79.735 88.138,80.953 88.138,85.576 88.287,85.725 88.588,85.725 R20.2@89.154,86.291 89.302,86.439 89.491,86.439 90.297,87.245 C8.1@90.297,89.027 90.48,88.844 90.48,88.605 90.749,88.336 93.648,88.336 96.244,90.932 v1(97.155,90.932) 97.223,90.864 99.007,90.864 99.032,90.839 99.06,90.811 Q1.3@99.06,90.797 ; v1(87.837,96.219) v1@87.837,96.008 ; R31.1@88.842,94.869 88.694,95.017 88.694,95.206 87.891,96.008 v1@87.837,96.008 ; C6.1@88.852,76.2 88.669,76.383 88.669,76.653 86.487,78.835 R12.1@86.487,79.491 86.339,79.639 85.921,79.639 83.622,81.938 83.114,81.938 C24.1@82.931,82.121 82.931,83.007 80.413,85.525 ; LS1.P@96.774,100.064 98.174,100.064 101.219,97.019 101.219,96.262 100.667,95.71 100.478,95.71 R27.1@100.33,95.562 100.33,92.137 Q1.3@99.06,90.867 ; Q1.3@99.06,90.727 99.113,90.674 99.512,90.674 102.628,87.558 102.628,84.34 102.858,84.11 102.858,78.282 Q5.3@101.6,77.024 ; Q4.3@100.719,82.931 100.719,77.905 Q5.3@101.6,77.024 ; Q5.3@101.6,76.954 Q5.3@101.6,77.024 ; 77.849,99.441 79.277,99.441 81.103,97.615 C30.2@82.931,97.615 83.008,97.538 83.622,97.538 84.201,96.959 R30.1@84.963,96.959 85.914,96.008 v1@87.837,96.008
  Top Layer w0.254: v1(60.249,67.51) 61.745,67.51 62.932,68.697 65.125,68.697 66.154,67.667 69.157,67.667 69.702,68.212 v1(69.752,68.212) ; v1(73.33,80.972) 73.33,82.521 74.077,83.268 74.077,85.782 v1(75.489,87.195)
  Bottom Layer 1 w0.254: v1(48.26,101.346) 48.535,101.346 49.043,100.838 v1(54.229,100.838) 55.118,101.727 56.134,101.727 56.896,100.965 57.912,100.965 59.182,102.235 62.611,102.235 62.638,102.208 63.417,102.208 63.644,101.981 64.516,101.981 65.781,103.246 v1@65.786,103.246 ; v1(60.249,67.51) 60.28,67.51 60.835,68.064 61.714,68.064 63.087,69.437 63.087,71.049 65.433,73.394 65.644,73.394 68.263,76.013 68.263,76.286 v1(68.377,76.4) ; v1(65.82,103.246) v1@65.786,103.246 ; v1(66.048,89.924) 66.21,89.924 66.611,90.326 66.806,90.326 67.615,91.135 v1(67.615,93.418) ; v1(75.438,93.853) 75.438,93.839 74.81,93.211 74.81,89.909 75.489,89.23 v1(75.489,87.195) ; v1(78.613,98.144) 78.613,98.298 78.022,98.889 72.854,98.889 72.136,98.171 71.535,98.171 71.281,97.917 v1(71.12,97.917) 69.215,97.917 v1(68.453,97.155) 66.484,99.124 66.484,99.886 66.421,99.949 66.421,101.473 65.786,102.108 v1@65.786,103.246 ; v1(87.837,96.219) 89.052,96.219 89.408,95.863 89.408,94.869 93.345,90.932 v1(97.155,90.932)
+5V_USB: C3.2 C17.2 D2.5 J3.A4 J3.A9 J3.B4 J3.B9 J4.15 U1.7 U1.8 U2.3 U2.4 | length 69.6
  Top Layer 1 w0.254: J4.15@35.433,78.613 41.148,78.613 v1@42.291,77.47 ; v1(60.509,63.198) 60.588,63.119 62.075,63.119 63.561,64.605 63.561,64.646 63.705,64.79 J3.B9@63.705,64.897 J3.A4@63.705,66.247 ; v1(66.846,68.748) 66.96,68.634 66.96,67.949 67.955,66.954 J3.A9@67.955,66.247 J3.B4@67.955,64.897 ; U1.7@67.184,69.873 U1.8@67.184,70.373 67.202,70.391 67.45,70.391 67.556,70.497 67.762,70.497 67.763,70.498 68.339,70.498 v1(68.453,70.612) 68.545,70.704 69.386,70.704 69.708,71.025 71.835,71.025 72.39,71.58 72.39,72.006 72.945,72.561 73.164,72.561 73.716,73.113 73.716,74.049 ; D2.5@71.691,69.698 74.012,69.698 75.806,71.491 75.806,71.913 75.565,72.154 75.565,72.771 ; C17.2@72.842,74.684 73.081,74.684 73.144,74.62 73.144,74.382 73.208,74.318 73.447,74.318 73.716,74.049 ; C3.2@75.565,73.708 75.565,72.771 ; 73.716,74.049 74.74,73.025 75.311,73.025 75.565,72.771
  Bottom Layer 1 w0.254: v1(42.215,77.67) 55.178,64.707 59.242,64.707 59.819,64.13 59.819,63.888 v1(60.509,63.198) ; J3.B9@63.705,64.897 63.705,64.79 63.849,64.646 63.849,64.605 64.573,63.881 67.31,63.881 67.879,64.45 67.879,64.821 J3.B4@67.955,64.897 ; v1(66.846,68.748) 67.91,69.812 67.91,70.016 68.453,70.559 v1(68.453,70.612)
+10V: B2.1 B2.8 C11.1 C18.1 DA1.1 | length 45
  Top Layer 1 w0.254: v1(48.454,87.049) 48.729,87.049 49.216,86.561 49.223,86.561 49.403,86.382 C11.1@49.403,85.629 ; DA1.1@50.419,101.727 50.419,100.21 51.054,99.575 v1(51.054,97.155) ; DA1.1@50.419,101.797 50.524,101.902 C18.1@52.959,101.902 ; v1(53.467,87.503) 54.93,87.563 54.997,87.63 B2.8@56.347,87.63 ; B2.1@60.747,86.63 61.191,86.63 61.969,85.852 v1(63.5,85.852)
  Bottom Layer 1 w0.254: v1(48.454,87.049) 48.454,87.189 48.768,87.503 ; v1(51.054,97.155) 51.308,96.901 51.427,90.957 cw(c50.165,90.932) 51.308,90.397 51.308,90.043 48.768,87.503 ; v1(63.5,85.852) 63.386,85.738 63.005,85.738 61.468,84.201 54.773,84.201 53.467,85.507 v1(53.467,87.503) 53.306,87.503 52.818,87.015 51.318,87.015 ccw(c49.082,82.239) 48.768,87.503
+36V: B3.4 B3.5 B6.8 B6.10 C14.2 C19.1 DA2.2 J2.2 P2.1 X1.1 | length 58.3
  Top Layer 1 w0.254: J2.2@55.372,110.236 55.669,110.236 57.531,108.374 v1(57.531,105.537) 56.676,104.682 DA2.2@55.88,104.682 ; DA2.2@55.88,104.612 56.273,104.219 C19.1@58.674,104.219 59.515,104.219 60.96,105.664 v1(61.595,105.664) ; C14.2@56.896,98.14 57.373,98.14 ; v1(57.658,101.854) 57.658,99.805 57.833,99.63 57.833,98.49 57.483,98.14 57.373,98.14 ; B3.4@59.563,92.903 61.319,92.903 61.468,93.052 61.468,93.853 B3.5@59.563,93.853 ; v1(60.607,97.467) 60.518,97.467 59.952,96.901 58.612,96.901 57.373,98.14 ; v1@61.849,105.537 62.492,104.894 B6.10@62.492,104.222 ; 63.484,105.148 63.484,105.35 64.346,106.212 64.556,106.212 v1(65.405,107.061) 66.04,106.426 66.542,106.426 66.582,106.466 66.691,106.466 67.564,107.339 P2.1@67.564,108.839 68.437,107.966 68.437,104.927 71.496,101.868 X1.1@72.134,101.868 ; B6.8@63.492,104.222 63.492,105.148
  Bottom Layer 1 w0.254: v1(57.531,105.537) 57.531,102.301 57.544,102.288 57.544,101.968 v1(57.658,101.854) ; v1(60.607,97.467) 60.607,97.423 61.468,96.562 v1(61.468,93.98) ; v1(61.595,105.664) 62.992,107.061 v1(65.405,107.061)
CS_RAM: U3.25 U4.1 | length 16.2
  Top Layer 1 w0.254: U3.25@74.447,86.023 v1@75.14,86.023 ; v1(75.489,85.925) 76.941,87.376 v1(79.375,87.376) ; U4.1@87.18,89.408 87.699,89.408 88.08,89.027 v1@88.265,89.027
  Bottom Layer 1 w0.254: v1(79.375,87.376) 80.972,88.973 v1(88.443,88.973)
EN_RST: R8.1 U1.19 | length 67
  Top Layer 1 w0.254: 63.5,72.644 63.246,72.898 63.246,73.932 64.921,75.607 65.063,75.607 66.218,76.762 v1(66.218,76.908) ; R8.1@78.232,94.165 78.925,94.165 v1@78.994,94.234
  Top Layer w0.254: v1(66.218,76.908) 67.396,76.908 67.694,77.206 69.142,77.206 70.656,75.692 87.122,75.692 v1@90.678,79.248 ; v1@81.316,100.584 82.333,100.584 91.738,91.179 91.738,87.46 90.431,86.153 90.431,82.543 90.602,82.372 v1(90.602,79.448)
  Bottom Layer w0.254: v1(78.918,94.434) 79.585,95.1 79.585,98.91 v1(81.331,100.657)